# Altium PCB USBc to Ethernet(2.0).PcbDoc (part 3 of 3)
Units mil, origin at the board's own origin, x right, y up, seen from the top; angles counter-clockwise.
Board outline 2450 x 1100 mil, 4 copper layers (L1, L2, L3, L4), stack 61.58 mil thick; 85 components, 67 nets, 300 pads, 234 vias.
Unrouted connection lines stored in the file: 3.
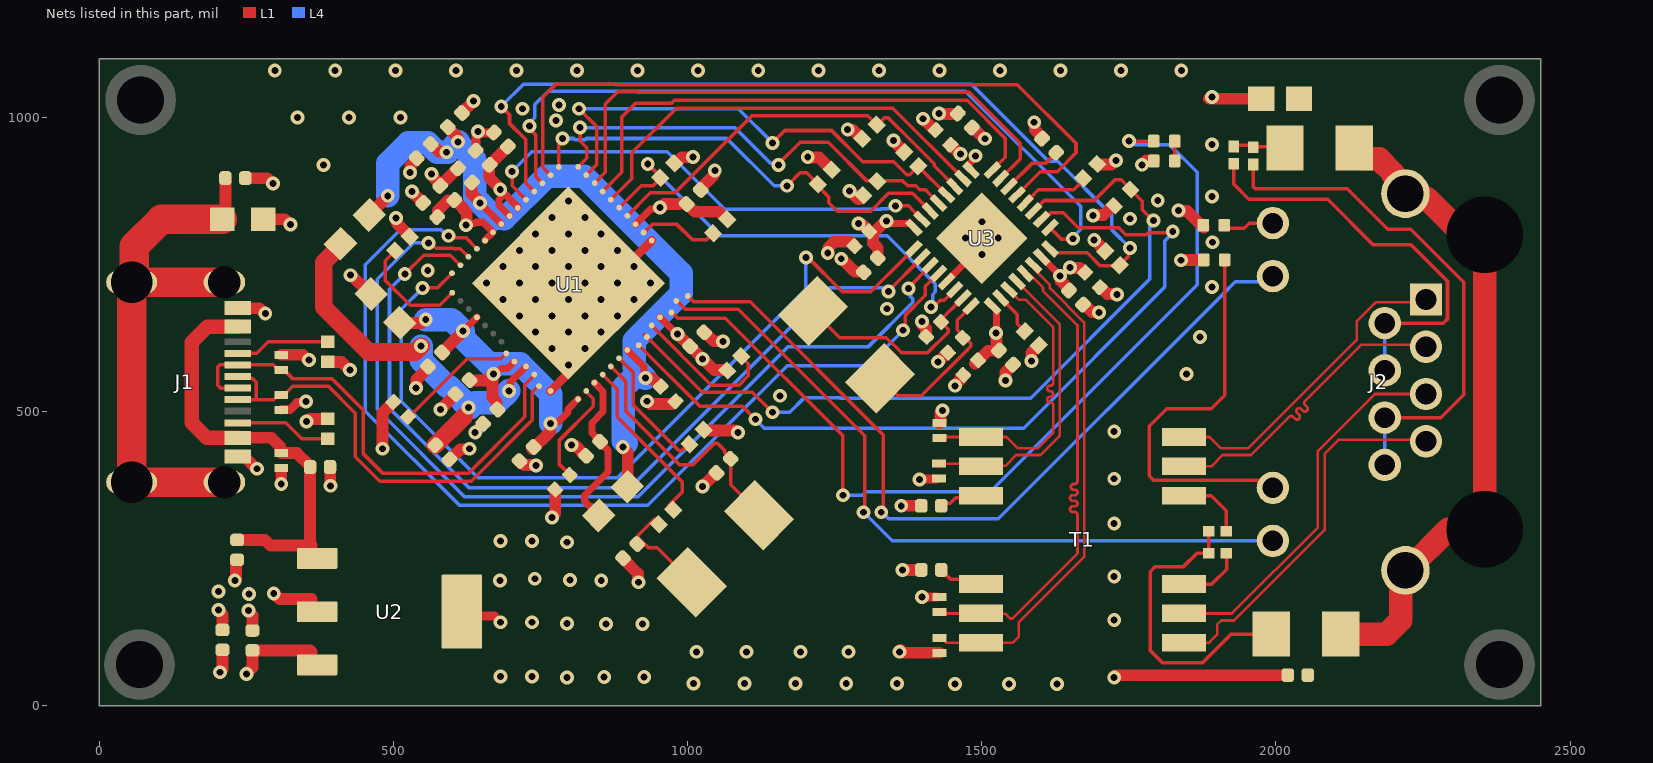
[diagram p4: the nets of this part, all layers, seen from the top]

## Part data (continued)
U3: library part CMP-09095-000001-1, "INDUSTRIAL ETHERNET GIGABIT PHY", Ambient Temperature Range High=+105°C, Ambient Temperature Range Low=-40°C, Manufacturer="Analog Devices", Max Junction Temp=+125°C, Max Supply Voltage=3.46V, Min Supply Voltage=1.71V, Nominal Supply Current=20-31mA, Package=CP-32-31, Temperature="-40°C to +105°C", Automotive=No, Category=IC, ComponentLink2Description=Datasheet, ComponentLink2URL=https://www.analog.com/media/en/technical-documentation/data-sheets/ADIN1200.pdf, Data Rate=100Mbits/s, Device Class L1="Integrated Circuits (ICs)", Device Class L2="Interface ICs", Device Class L3="Ethernet Interface ICs", Digikey Description="INDUSTRIAL ETHERNET GIGABIT PHY", Footprint Url=https://forum.upverter.com/uploads/short-url/dN8iC8CK9Ps5z8gUJcfltSaVrDQ.pdf, Height=0.8mm, Interface=Ethernet, Ipc Land Pattern Name=QFN50P500X500X75-32, Lead Free=Yes, Manufacturer Part Number=ADIN1200CCP32Z, Number of Channels=4, Octopart=https://octopart.com/adin1200ccp32z-analog+devices-103760365, RoHS=TRUE, Simplex Duplex="Full Duplex", Standoff Height=0.02mm, Temperature Range High=+105°C, Temperature Range Low=-40°C
Y1 Y2: library part 445I23A25M00000, "Parallel - Fundamental Quartz Crystal, 25MHz Nom", Case/Package=SMD/SMT, ESR (Equivalent Series Resistance)=40Ω, Frequency=25MHz, Frequency Stability=30ppm, Frequency Tolerance=0.002%, Load Capacitance=10pF, Manufacturer="CTS Components", Max Operating Temperature=85°C, Min Operating Temperature=-40°C, Category=Crystals, ComponentLink1Description=https://datasheet.octopart.com:443/445I23A25M00000-CTS-Components-datasheet-78374999.pdf?src-supplier=Electro+Sonic, ComponentLink1URL=https://datasheet.octopart.com:443/445I23A25M00000-CTS-Components-datasheet-78374999.pdf?src-supplier=Electro+Sonic, Contact Plating=Gold, Country of Origin="Mainland China", Harmonized Tariff Schedule (HTS) Code=8541.60.00.60, Height=1.3462mm, Introduction Date=2016-10-07, Length=5.0038mm, Lifecycle Status=Production, Manufacturer Part Number=445I23A25M00000, Mount="Surface Mount", Packaging="Tape & Reel", Pricing 1="6000=0.4851 (USD)", REACH SVHC=Unaffected, RoHS=Compliant, Series Resistance=40Ω, Supplier 1=DigiKey, Termination=SMD/SMT, Tolerance=0.002%, Width=3.2mm

## Free pads (board coordinates)
  round 120 hole 80: MH3(68,70) MH3(70,1030) MH3(2380,70) MH3(2380,1030)

## Via types
v1: diameter 23.62, hole 11.81, L1 to L4, tented both sides, 194 vias
v2: diameter 23.62, hole 11.81, L1 to L4, 40 vias

## Nets (pads, with @x,y where several pads share a name; then routed paths per layer and width w, separated by ;. In a path a pad name is that pad's centre, name@x,y a point inside that pad or via, vN(x,y) a via of type N, cw(c..) or ccw(c..) an arc to the next point about the centre after c; other vN are vias at no path point)
+3.3V: C10.2 C11.2 C13.2 C14.2 C15.2 C16.2 C17.2 C18.2 C19.2 C20.2 C21.2 C22.2 C23.2 C24.2 C25.2 C39.2 FB1.1 R2.2 R3.2 R4.2 R6.1 R14.2 R17.2 R18.2 R19.2 R20.2 R21.2 R22.2 R23.1 U1.25 U1.35 U1.48 U1.49 U1.51 U1.52 U2.3 U3.9 U3.15 U3.25 U3.32 | length 1770.6
  L1 w12: v1@626.02,820.02 626.36,819.68 637.7,819.68 640.02,822 652.08,822 U1.51@668.98,805.1 655.46,791.58 U1.52@655.46,790.78 ; v1(681.31,878) 711.14,848.17 U1.48@711.14,846.46 ; v1@688,869.84 679.13,860.96 679.13,850.63 U1.49@697.22,832.54 ; U1.35@911.02,818.62 937.11,844.7 950.7,844.7 v1(953,847) ; U1.25@952.78,660.49 980.91,632.37 v1(982.37,632.37) ; v1(1337.57,824.28) 1341.35,824.28 1345.43,820.19 1377.37,820.19 U3.32@1384.4,813.16 ; U3.25@1474.94,917.63 1486.78,929.47 1486.78,932.78 v1(1489,935) ; U3.9@1518.16,679.4 1525.06,672.5 1525.06,635.06 v1(1524,634) ; U3.15@1601.68,762.92 1601.68,762.78 1633,731.46 v1(1633,731)
  L1 w20: v1(205,57) 205,58.08 209,62.08 C11.2@209,95.07 ; v1(250,54) 250,55.08 260,65.08 C10.2@260,94.14 358.28,94.14 360.97,91.45 ; v1(427,732) 428.08,732 460,700.08 FB1.1@461.75,700.08 ; v1(504.37,829.57) 505.14,828.8 505.14,820.59 527.16,798.57 R21.2@527.16,797.68 ; C39.2@574.16,830.84 575,831.67 575,841.89 592.11,859 602.33,859 C14.2@603.16,859.84 603.75,859.84 619,844.59 619,843.4 624.5,837.9 624.5,819.59 623,818.08 v1(623,817) ; v1(681.31,878) 681.31,879.08 662.46,897.94 662.46,918.87 C17.2@663.29,919.71 C16.2@694.29,950.71 ; v1(953,847) 954.08,847 960.08,853 986.18,853 987.05,853.86 997.19,853.86 C13.2@998.03,853.03 ; R17.2@977.03,922.03 977.86,921.19 978.75,921.19 990.08,932.52 1007.44,932.52 v1@1007.92,933 ; v1(982.37,632.37) 982.53,632.37 1004.7,610.19 C15.2@1004.83,610.19 ; C13.2@998.92,853.03 1011.95,840 1053.16,840 1066.14,827.03 R22.2@1067.03,827.03 ; C15.2@1004.92,611.03 1004.92,609.98 1025.37,589.53 v1(1025.37,589.37) 1026.35,589.37 1044.9,570.81 1065.25,570.81 R14.2@1066.08,569.97 ; R6.1@1027.03,469.03 1027.86,468.19 1080.83,468.19 1084.24,464.78 v1(1085.22,464.78) ; v1(1271.97,979.97) 1272.66,979.27 1280.78,979.27 1296.08,963.97 R18.2@1296.97,963.97 ; v1(1290,820) 1290.77,819.23 1295.6,819.23 1308.3,806.53 C25.2@1308.53,806.53 ; C24.2@1323.14,762.7 1323.14,778.36 1315.13,786.36 1315.13,802.93 1336.48,824.28 v1(1337.57,824.28) ; v1(1350,961) 1350,960 1368.03,941.97 1368.03,941.08 R20.2@1367.97,941.03 ; C21.2@1446.43,953.63 C21.2@1446.8,954.01 ; C21.2@1446.9,954.11 C21.2@1446.8,954.01 ; C21.2@1446.9,954.13 1455.03,946 ; v1(1464,938) 1463.03,938 1447.03,954.01 C21.2@1446.8,954.01 ; C19.2@1482.97,983.03 1483.54,983.59 1484.43,983.59 1504.02,964 v1(1505,964) ; C20.2@1488.53,581.53 1510.44,603.44 1527,603.44 1527.3,603.14 1528.19,603.14 C18.2@1529.03,603.97 ; v1(1524,634) 1524.69,633.31 1524.69,618.31 1525,618 ; v1(1633,731) 1633.77,730.23 1633.77,722.8 1648.86,707.7 1648.86,706.81 C22.2@1648.03,705.97 ; v1@1650.07,744.8 1650.56,744.31 1666.52,744.31 1674.78,736.05 1675,736.05 C23.2@1675.47,736.53 ; v1(1688.81,833.62) 1689.5,834.32 1706.75,834.32 1723.69,851.25 1723.91,851.25 R23.1@1725.08,850.08 ; v1(1691,792) R19.2@1709.97,773.03 ; v1(1772.08,919.7) 1779.56,927.17 1792.24,927.17 1792.39,927.33 R2.2@1792.39,928 ; v1(1834,842) 1834.69,841.31 1848.65,841.31 R3.2@1877.13,812.83 ; v1(1838.19,757.46) 1838.46,757.73 1877.13,757.73 1877.28,757.89 R4.2@1877.28,758
  other v1: 1650.07,745.07 1009,933
"+3.3V VDD": C26.2 C27.2 C28.2 C29.2 FB1.2 U1.4 U1.9 U1.15 | length 736.2
  L1 w12: v1(618,637) U1.4@641.54,660.49 ; v1(669.94,564.33) 673.73,564.33 682.55,573.15 693.39,573.15 U1.9@705.43,585.19 ; v1(767,480) 769.3,482.3 779.87,482.3 796.77,499.2 796.77,504.49 U1.15@813.59,521.3
  L1 w20: FB1.2@510.57,651.27 511.22,650.62 547.53,650.62 553.57,656.67 v1(554.65,656.67) ; C27.2@582.29,600.65 582.29,600.97 618,636.68 v1(618,637) ; C29.2@629.13,553.65 629.97,552.81 657.35,552.81 668.86,564.33 v1(669.94,564.33) 669.94,563.25 668.26,561.56 668.26,523.66 675.46,516.46 675.46,504.48 C28.2@676.29,503.65 ; C26.2@736,436 766.23,466.23 766.23,479.23 v1(767,480)
  L4 w40: v1(554.65,656.67) 598.33,656.67 v1(618,637) 618,625.43 668.43,575 674.69,581.26 715.31,581.26 767,529.57 v1(767,480)
+5V: C1.2 C12.2 D2.2 J1.A4B9 J1.B4A9 U2.1 | length 729.6
  L1 w20: C12.2@234,282 281.13,282 290.57,272.55 360.97,272.55 358.07,275.45 C1.2@358.07,406 357.44,406.63 357.44,407.81 335.66,429.59 D2.2@309,429.59 307.19,431.4 307.19,440.69 292.36,455.51 J1.B4A9@234.84,455.51
  L1 w25: J1.B4A9@234.84,455.51 182.49,455.51 157,481 157,618 183.49,644.49 J1.A4B9@234.84,644.49
GA: J2.10 R4.1 | length 683.5
  L1 w6: R4.1@1912.72,758 1912.72,527.72 1890,505 1814,505 1784.49,475.49 1784.49,390.79 1792.24,383.04 1968.98,383.04 1981.47,370.55 J2.10@1994.76,370.55
GND: C1.1 C2.1 C3.1 C4.1 C5.1 C6.1 C7.2 C10.1 C11.1 C12.1 C13.1 C14.1 C15.1 C16.1 C17.1 C18.1 C19.1 C20.1 C21.1 C22.1 C23.1 C24.1 C25.1 C26.1 C27.1 C28.1 C29.1 C30.1 C31.1 C32.1 C33.1 C34.1 C35.1 C36.1 C37.2 C38.2 C39.1 D1.1 D2.1 D3.1 D4.1 D5.1 D6.1 D7.1 J1.A1B12 J1.B1A12 R1.2 R5.2 R8.2 R9.2 R15.1 R16.1 R24.1 R25.1 R26.1 R27.2 U1.13 U1.33 U1.57 U2.2 U2.4 U3.5 U3.33 | length 2765.4
  L1 w12: U3.5@1440.08,721.16 1486.08,767.16 v2(1500,767.16)
  L1 w15: D1.1@309,503 309.61,503.61 324.02,503.61 335.76,515.35 349.35,515.35 v1(351,517) ; U2.4@607.03,182 607.03,179.62 633.98,152.67 672,152.67 ; C17.1@640.19,945.19 640.19,970.85 643.24,973.9 v1(643.24,976.24) 648.89,976.24 651.31,973.81 669.52,973.81 C16.1@670.35,974.65 C16.1@671.19,975.48 ; U1.13@766.82,535.22 797.16,565.56 v2(797.16,579.48) ; v2(908.52,746.52) 908.52,760.44 U1.33@938.86,790.78 ; v1(1394,385) 1394.6,385.6 D7.1@1422.69,385.6 ; v1(1398,185) D4.1@1423.69,185
  L1 w20: v1(202,163.07) 202,161.99 209,154.99 C11.1@209,128.93 ; v1(230,213) 230,213.98 232.19,216.17 232.19,247.51 232.82,248.14 C12.1@234,248.14 ; J1.B1A12@234.84,424.02 245.67,424.02 265.92,403.77 267.23,403.77 v1(268,403) ; J1.A1B12@234.84,675.98 236.65,675.98 271.76,675.98 280.76,666.98 v1(281.84,666.98) ; C4.1@247.93,897 284.84,897 293.85,887.99 v1(294.93,887.99) ; v1(253,162.14) 253,161.06 260,154.06 C10.1@260,128 ; R15.1@278,827 279.81,827 314.91,827 323.92,817.99 v1(325,817.99) ; v1(296.26,190.91) 296.81,190.91 306.22,181.5 360.47,181.5 360.97,182 ; v1(309,377) D2.1@309,400.89 ; D3.1@309,596.59 310.81,596.59 345.91,596.59 354.92,587.58 v1(356,587.58) ; v1(352,483) 353.08,483 357.46,487.38 386.19,487.38 386.82,488.01 R5.2@388,488.01 ; R1.2@388,585 389.18,585 389.81,584.37 411.55,584.37 424.92,571 v1(426,571) ; C1.1@391.93,406 392.46,405.46 392.46,374.54 v1(393,374) ; v1(481,437) 481,497.66 R8.2@499,515.66 ; v1(527.81,906.34) 528.5,907.03 528.5,917.62 540.05,929.17 540.05,930.06 C32.1@539.22,930.9 ; v1(531,874) C39.1@550.22,854.78 ; v1(538,540) 538.77,540.77 538.77,554.56 559.19,574.98 C27.1@557.46,576.7 ; v1(564.51,904.4) 564.51,903.42 567,900.93 567,898.56 580.05,885.51 C14.1@580.05,884.62 ; C14.1@579.22,883.78 C14.1@580.05,884.62 ; C14.1@579.35,883.78 580.05,884.48 C14.1@580.05,884.62 ; v1(579.8,503.8) 579.8,504.05 605.19,529.45 C29.1@605.19,529.71 ; C34.1@594.97,419.03 595.86,419.03 613.14,436.31 628.31,436.31 v1(629,437) ; C31.1@609.09,913.65 C14.1@580.05,884.62 ; C33.1@616.1,1007.78 616.1,1007.94 636,1027.84 v1(636,1028) ; C26.1@714.03,416.03 714.92,416.03 721.45,409.5 741.16,409.5 v1(741.85,408.81) ; v1(769,320.19) 769,321.17 774.95,327.11 774.95,367 R9.2@774.47,367.47 ; v1(802.72,443.28) 803.41,442.59 808.58,442.59 826.14,425.03 C36.1@827.03,425.03 ; C2.1@890.06,251.06 890.06,250.17 915.31,224.92 915.31,210.69 v1(916,210) ; v1(930.72,517.72) 931.7,517.72 936.27,513.14 974.4,513.14 978.94,517.68 C30.1@979.16,517.68 ; C13.1@1021.97,877.86 1021.14,878.69 1045.24,902.8 1045.24,909.23 v1(1046.01,909.99) ; v1(1024.97,372.97) 1025.47,372.97 1048.53,396.03 C3.1@1049.03,396.03 ; C15.1@1027.97,634.97 1028.86,634.97 1044.14,619.69 1059.31,619.69 v1(1060,619) ; v1(1204,933) 1204.77,932.23 1222.93,932.23 1244.14,911.03 R26.1@1245.03,911.03 ; v1(1238,770) 1238.77,770.77 1238.77,778.78 1248.99,789 1275.72,789 1283.25,781.47 C25.1@1283.47,781.47 ; v1(1261,760) 1262.08,760 1284.22,737.86 1299.19,737.86 C24.1@1300.03,737.03 ; v1(1275,875) 1276.06,875 1290.08,860.97 R25.1@1290.97,860.97 ; v1@1361.67,95.31 1366.98,90 D5.1@1428,90 ; v1(1363,340) 1393.94,340 1395.35,341.41 C6.1@1395.35,342.28 ; v1(1365,231) C5.1@1397.07,231 ; v1(1398,653) 1398.69,652.31 1398.69,647.82 1405,641.51 C38.2@1405,628.17 ; v1@1400.69,997.31 C21.1@1414.73,983.27 ; v1(1425.14,584.8) 1425.97,584.8 1441.95,600.78 1442.17,600.78 C37.2@1442.47,600.47 ; v1(1427,1007) 1427.69,1006.31 1431.7,1006.31 1431.87,1006.14 C19.1@1457.3,1006.14 ; D6.1@1428,480.59 1429.81,482.4 1429.81,498.02 1433,501.21 v1(1433,502.19) ; v1(1454,544) 1454,544.98 1465.47,556.45 C20.1@1465.47,559.47 ; v1(1540.02,553.25) 1540.02,567.08 C18.1@1552.97,580.03 ; v1(1584.08,586.2) 1584.08,600.03 R27.2@1597.03,612.97 1597.03,613.2 R27.2@1596.55,613.67 ; v1(1589,992) 1589.77,991.23 1589.77,979.4 1603.28,965.89 1602.45,965.05 C35.1@1602.45,964.16 ; C22.1@1671.97,682.03 1672.81,682.86 1673.7,682.86 1686.95,669.61 1698.39,669.61 v1(1699.15,668.85) ; R24.1@1696.03,921.03 1696.86,920.19 1720.21,920.19 1727.02,927 v1(1728,927) ; C23.1@1700.53,711.47 1701,711.95 1701.22,711.95 1713.05,700.11 1728.89,700.11 v1(1729.65,699.35) ; v1@1724.17,48 1723.19,48 v1@1727.19,52 ; v1@1729.98,52 C7.2@2020.14,52 ; v1@1886,1032 R16.1@1973.46,1032
  L4 w20: v1(638.73,464.27) 638.73,464.73 653,479
  other v1: 1454,37 1546,37 1628,37 1010,38 1096.5,38 1183,38 1269.5,38 1356,38 795,48 1725,48 858,49 926,49 682,50 735,50 1015,91.81 1100,91.81 1192,91.81 1273,91.81 1360,91.81 861,139 923,139 795,140 682,142 735,142 1725,146 254,190 202,194 681,213 853,213 800,214 740,216 1725,220 795,278 682,280 735,280 1725,310 1725,386 1725,466 1157,527 1848,564 1871,627 1339,675 1891,712 558,740 1892,788 1752,828 1799,859 1891,866 381,919 1891,954 776,995 1400,998 336.5,1000 424,1000 511.5,1000 719,1015 781,1021 1891,1035 298,1080 400.73,1080 503.47,1080 606.2,1080 708.93,1080 811.67,1080 914.4,1080 1017.13,1080 1119.87,1080 1222.6,1080 1325.33,1080 1428.07,1080 1530.8,1080 1633.53,1080 1736.27,1080 1839,1080
  other v2: 769.32,607.32 825,607.32 741.48,635.16 797.16,635.16 852.84,635.16 713.64,663 769.32,663 825,663 880.68,663 685.81,690.84 741.48,690.84 797.16,690.84 852.84,690.84 908.52,690.84 657.97,718.68 713.64,718.68 769.32,718.68 825,718.68 880.68,718.68 936.36,718.68 685.81,746.52 741.48,746.52 797.16,746.52 852.84,746.52 713.64,774.36 769.32,774.36 825,774.36 880.68,774.36 1472.16,795 1527.84,795 741.48,802.19 797.16,802.19 852.84,802.19 1500,822.84 769.32,830.03 825,830.03 797.16,857.87
GND_CLASSIS: C7.1 C8.1 C9.1 J2.MH1 J2.MH2 J2.S1 J2.S2 R16.2 | length 1149.1
  L1 w40: C8.1@2110.06,122 2188.36,122 2211.79,145.43 2211.79,222.23 J2.S1@2219.96,230.39 2223.12,230.39 2293.2,300.47 J2.MH1@2355,300.47 J2.MH2@2355,800.47 2318.53,800.47 2256.61,862.39 J2.S2@2228.13,862.39 ; C9.1@2136.06,948 2136.06,941.11 2147.55,929.61 2175.19,929.61 2198.62,906.18 2198.62,903.44 2219.96,882.1 J2.S2@2219.96,870.55 J2.S2@2219.96,874.84
GND_USB: C4.2 J1.S1 J1.S2 J1.S3 J1.S4 R15.2 | length 946
  L1 w20: R15.2@208.97,827 214.07,832.1 C4.2@214.07,897
  L1 w50: J1.S3@67.72,720.08 J1.S1@212.2,720.08 ; R15.2@208.97,827 105,827 58.92,780.92 58.92,724.28 J1.S3@54.72,720.08 J1.S4@54.72,379.92 J1.S2@212.2,379.92
"LNKA LED": J2.9 U1.27 | length 1261.8
  L1 w6: U1.27@980.62,688.33 981.68,688.33 996.01,674 1086,674 1300.63,459.37 1300.63,330.63 v1(1299,329)
  L4 w6: v1(1299,329) 1347.61,280.39 J2.9@1994.76,280.39
"MAC COL": R19.1 U1.46 U3.16 | length 1550
  L1 w6: v1(683,1019) 697,1005 697,990 725,962 725,888.27 U1.46@738.98,874.3 ; U3.16@1615.6,776.84 1622.63,769.81 1626.74,769.81 1626.93,770 1630,770 1679,770 1700.84,748.16 1722.38,748.16 1733.19,748.14 R19.1@1734.03,748.97 1748.74,763.69 1748.74,774.74 v1(1752,778)
  L4 w6: v1(683,1019) 721,1057 1482,1057 1613.21,925.79 1628.91,925.79 1721.13,833.57 1721.13,808.87 v1(1752,778)
"MAC CRS": U1.45 U3.17 | length 1273.8
  L1 w6: v1(730.72,985.72) 730.72,980.95 741.33,970.33 741.33,899.78 U1.45@752.9,888.22 ; U3.17@1615.6,813.16 1635.39,793.37 1654.41,793.37 v1(1654.97,793.94)
  L4 w6: v1(730.72,985.72) 730.72,990.48 740.15,999.92 740.15,1022.15 763,1045 1472,1045 1668,849 1668,810.34 1654.97,797.31 v1(1654.97,793.94)
MDC: U1.22 U3.18 | length 1396.5
  L1 w6: U1.22@916.73,613.03 1020.76,509 1093.01,509 v1(1114.91,487.1) ; U3.18@1601.68,827.08 1605.79,827.08 1616.71,838 1638.55,838 1663.74,812.81 1732.76,812.81 1744.57,801 1779.59,801 1782.78,804.19 1822.56,804.19 v1(1824.47,806.1)
  L4 w6: v1(1114.91,487.1) 1130.01,472 1571,472 1811,712 1811,790.14 1824.47,803.61 v1(1824.47,806.1)
MDI_0_N: D7.2 T1.2 U3.12 | length 527.3
  L1 w4.5: D7.2@1422.71,411.29 D7.2@1427,407 ; D7.2@1427,411.8 1427.16,411.64 1493.72,411.64 T1.2@1498.36,407 1499.26,407.9 1539.88,407.9 1558.23,426.25 1599.51,426.25 1632.64,459.38 1632.64,648.44 1570.54,710.54 U3.12@1559.92,721.16
MDI_0_P: D6.2 T1.1 U3.11 | length 519.5
  L1 w4.5: D6.2@1428,457 T1.1@1498.36,457 1542,457 1561.25,437.75 1594.75,437.75 1621.14,464.14 1621.14,508.75 1621.14,511 ccw(c1616.39,511) 1616.39,515.75 1615.75,515.75 cw(c1615.75,520.5) 1615.75,525.25 1616.39,525.25 ccw(c1616.39,530) 1616.39,534.75 1615.75,534.75 cw(c1615.75,539.5) 1615.75,544.25 1616.39,544.25 ccw(c1616.39,549) 1621.14,549 1621.14,572.75 1621.14,643.67 1574.82,690 1563,690 1547.76,705.24 U3.11@1543,705.24
MDI_1_N: D5.2 T1.8 U3.14 | length 855.8
  L1 w4.5: D5.2@1428,115.59 1431.41,115.59 1440,107 T1.8@1498.36,107 1552,107 1563,118 1563,142.12 1674,253.12 1674,393 1674,651.63 1615.52,710.11 1615.52,715.68 1596.46,734.74 1596.46,735.13 1587.76,743.83 U3.14@1587.76,749
MDI_1_P: D4.2 T1.7 U3.13 | length 850.8
  L1 w4.5: D4.2@1426.57,158.43 1428,158.43 1429.43,157 T1.7@1498.36,157 1498.87,156.49 1539.88,156.49 1547.95,148.41 1551.68,148.41 1662.5,259.23 1662.5,322.5 1662.5,324.75 ccw(c1657.75,324.75) 1657.75,329.5 1654.58,329.5 cw(c1654.58,334.25) 1654.58,339 1657.75,339 ccw(c1657.75,343.75) 1657.75,348.5 1654.58,348.5 cw(c1654.58,353.25) 1654.58,358 1657.75,358 ccw(c1657.75,362.75) 1657.75,367.5 1655.99,367.5 cw(c1655.99,372.25) 1655.99,377 1657.75,377 ccw(c1657.75,381.75) 1662.5,381.75 1662.5,402.5 1662.5,646.87 1604.02,705.35 1604.02,710.91 1588.33,726.6 1587.49,726.6 1579.01,735.08 U3.13@1573.84,735.08
MDIO: R23.2 U1.23 U3.19 | length 1374.3
  L1 w6: 926,631 930.35,626.65 930.95,626.65 1024.49,533.11 1109.89,533.11 v1(1144,499) ; U3.19@1587.76,841 1605.76,859 1617.55,859 1691.3,859 1726.36,894.06 1736.78,894.06 1772.92,857.92 1772.92,843.46 1791.38,825 v1(1792,825)
  L4 w6: v1(1144,499) 1173.48,499 1198.48,524 1258.09,524 1259.09,523 1583,523 1785,725 1785,813.23 1792,820.23 v1(1792,825)
NetC2_2: C2.2 R7.1 Y1.1 | length 152.1
  L1 w6: R7.1@942.97,316.97 913.97,287.97 921.97,279.97 933.3,268.64 948.08,268.64 Y1.1@996.86,219.86
NetC3_2: C3.2 U1.19 Y1.2 | length 432.5
  L1 w6: U1.19@869.26,576.98 895,551.24 895,501 986,410 1009,410 1045.51,446.51 1050.49,446.51 1063,434 1063,429.95 C3.2@1072.97,419.97 1073,375.97 1111,337.97 Y1.2@1111,334
NetC5_2: C5.2 T1.6 | length 77.4
  L1 w6: C5.2@1430.93,231 1446.4,215.52 1489.84,215.52 T1.6@1498.36,207
NetC6_2: C6.2 T1.3 | length 74.5
  L1 w6: C6.2@1430.93,340 1435.33,344.4 1446.4,344.4 1455.48,353.48 1494.84,353.48 T1.3@1498.36,357
NetC8_2: C8.2 R10.1 R11.1 | length 543.9
  L1 w6: R11.1@1886,297 R10.1@1886,259 1865,259 1842,236 1794,236 1786,228 1786,94 1807,73 1875,73 1924,122 C8.2@1991.94,122 ; C8.2@1974.91,128.96 C8.2@1991.94,146
NetC9_2: C9.2 R12.1 R13.1 | length 93.1
  L1 w6: R12.1@1934,952.76 1942,952.76 R13.1@1958,952.76 ; R13.1@1965,951.53 1966.04,951.53 1966.86,950.71 2017.29,950.71 C9.2@2028.91,939.09
NetC35_2: C35.2 U3.22 | length 104.2
  L1 w6: U3.22@1546,882.76 1585.18,921.94 1608.1,921.94 C35.2@1626.39,940.22
NetC37_1: C37.1 U3.8 Y2.1 | length 289.6
  L1 w6: Y2.1@1327.07,556.93 1327.86,556.93 1357.79,527 1397.04,527 1472.44,602.41 1481.29,611.25 1481.29,616.22 C37.1@1469.75,627.75 ; C37.1@1469.06,627.06 1469.06,628.01 1458,639.07 1458,655.13 1481.84,678.97 U3.8@1481.84,679.4
NetC38_1: C38.1 U3.7 Y2.2 | length 351.8
  L1 w6: Y2.2@1212.93,671.07 1258.22,625.78 1337.76,625.78 1363.54,600 1407.7,600 1441.27,633.58 1442.89,635.19 1442.89,640.16 C38.1@1430.53,652.53 ; C38.1@1428.68,654.38 1467.62,693.32 U3.7@1467.92,693.32
NetJ1_A5: J1.A5 R1.1 | length 161.4
  L1 w6: J1.A5@234.84,599.21 267.21,599.21 287.02,619.02 R1.1@388,619.02
NetJ1_B5: J1.B5 R5.1 | length 164.4
  L1 w6: J1.B5@234.84,481.1 316.9,481.1 344.01,453.99 R5.1@388,453.99
NetJ2_2: J2.2 J2.4 R12.2 | length 720.4
  L1 w6: R12.2@1928,921.24 1928,887 1953.8,861.2 2087.8,861.2 2165,784 2229.48,784 2291.56,721.92 2291.56,657.56 2284.47,650.47 J2.2@2184.92,650.47
  L4 w6: J2.4@2184.92,570.16 J2.2@2184.92,650.47
NetJ2_6: J2.6 J2.8 R13.2 | length 884.7
  L1 w6: R13.2@1961,920.24 1961,882.51 1964.51,879 2121,879 2189.88,810.12 2228.88,810.12 2319,720 2319,529 2279.84,489.84 J2.6@2184.92,489.84
  L4 w6: J2.8@2184.92,409.53 J2.6@2184.92,489.84
NetLED1_2: LED1.2 R2.1 | length 38
  L1 w6: R2.1@1827.83,928 LED1.2@1827.83,966
NetR6_2: R6.2 U1.20 | length 221.7
  L1 w6: U1.20@883.18,590.9 907,567.08 907,512 985.18,433.82 990.15,433.82 1001.3,444.97 R6.2@1002.97,444.97
NetR7_2: R7.2 U1.18 | length 287.7
  L1 w6: U1.18@855.34,563.06 880,538.4 880,491 991,380 991,364 R7.2@968.03,341.03
NetR8_1: R8.1 U1.8 | length 207.6
  L1 w6: R8.1@528,492.85 528,493 625,590 682.4,590 U1.8@691.51,599.11
NetR9_1: R9.1 U1.16 | length 178.8
  L1 w6: R9.1@799.53,392.53 781.9,410.15 781.9,451.9 839.51,509.51 839.51,522.15 827.51,534.16 U1.16@827.51,535.22
NetR10_2: R10.2 T1.11 | length 109.9
  L1 w6: T1.11@1843.64,207 1891,207 1916,232 1916,258.53 R10.2@1915.53,259
NetR11_2: R11.2 T1.14 | length 116.9
  L1 w6: T1.14@1843.64,357 1890,357 1915.53,331.47 R11.2@1915.53,297
NetR14_1: R14.1 U1.24 | length 250.8
  L1 w6: U1.24@938.86,646.58 938.86,646.44 1040.2,545.11 1087.11,545.11 1103,561 1103,581.54 1091.03,593.51 R14.1@1091.03,594.03
NetR27_1: R27.1 U3.10 | length 73.2
  L1 w6: U3.10@1532.08,693.32 1555.98,669.43 1560.36,665.04 1560.36,649.64 R27.1@1572.97,637.03
"PDX LED": LED1.1 U1.26 | length 1603.2
  L1 w6: U1.26@972.41,668.71 973.47,668.71 983.17,659 1064,659 1263.9,459.1 v1(1263.9,357.91) ; v1@1750.29,959.71 1785.71,959.71 LED1.1@1792,966
  L4 w6: v1(1263.9,357.91) 1296.72,357.91 1302.81,364 1514,364 1866,716 1866,907.02 1819.02,954 1760.77,954 1754.77,960 v1(1750,960)
"PHY INT": R21.1 U1.1 | length 197.7
  L1 w6: R21.1@503.11,773.62 486,756.52 486,723 528,681 578.53,681 U1.1@599.78,702.25
"PHY LINK ST": R24.2 U3.20 | length 106.8
  L1 w6: U3.20@1573.86,854.92 1584.47,865.53 1595.93,877 1599.55,877 1656,877 R24.2@1666.97,887.97
"PHY RESET": R17.1 U1.37 U3.6 | length 791.3
  L1 w6: U1.37@883.58,846.86 920.73,884 941,884 952.97,895.97 952.97,900.03 v1(932,921) ; v1(1413.61,678.18) 1418.38,678.18 1429.55,689.35 1436.11,689.35 U3.6@1454,707.24
  L4 w6: v1(932,921) 1054,799 1339,799 1421,717 1421,703.67 1416.32,698.99 1416.32,680.89 v1(1413.61,678.18)
"PHY SEL": R22.1 U1.34 | length 139.7
  L1 w6: U1.34@924.94,804.7 926,804.7 940.3,819 981,819 1008,792 1032,792 R22.1@1042.97,802.97
RD_N: J2.7 T1.9 | length 641.4
  L1 w4.5: T1.9@1843.64,107 1886.36,107 1889,109.64 1889,110 1900,121 1900,138 1907,145 1929,145 2082.62,298.62 2082.62,428.36 2106.26,452 2252.68,452 J2.7@2255,449.68
RD_P: J2.5 T1.10 | length 641.9
  L1 w4.5: T1.10@1843.64,157 1924.74,157 2071.12,303.38 2071.12,317.75 2071.12,433.12 2168,530 J2.5@2255,530
RXCLK: R20.1 U1.41 U3.28 | length 847.6
  L1 w6: v1(815,1015) 845,985 845,919.63 U1.41@827.51,902.14 ; v1(1144,957) 1165,978 1244.5,978 1297.5,925 1350,925 1372.54,902.46 1377.51,902.46 R20.1@1392.03,916.97 1392.03,916.89 U3.28@1440.08,868.84
  L4 w6: v1(815,1015) 1086,1015 v1(1144,957)
RXD0: R18.1 U1.36 U3.27 | length 688.7
  L1 w6: U1.36@897.5,832.94 936.56,872 978.31,872 1109.12,1002.81 1306.24,1002.81 R18.1@1321.03,988.03 1323.03,988.03 1335,1000 1340,1000 1358.19,981.81 1358.62,981.81 1418.89,921.54 1418.89,917.86 U3.27@1454,882.76
RXD1: U1.38 U3.26 | length 738.2
  L1 w6: U1.38@869.26,860.38 905,896.11 905,940 981,1016 1348.6,1016 U3.26@1467.92,896.68
RXD2: U1.39 U3.24 | length 893.9
  L1 w6: U1.39@855.34,874.3 888,906.95 888,1001 911,1024 972.03,1024 977.53,1029.51 1474.93,1029.51 1540,964.43 1540,932.44 U3.24@1518.16,910.6
RXD3: U1.40 U3.23 | length 965.3
  L1 w6: U1.40@841.82,888.62 860,906.79 860,1023 881,1044 914.03,1044 915.03,1043 1478.4,1043 1565,956.4 1565,929.6 U3.23@1532.08,896.68
RXDV: R25.2 U1.42 U3.29 | length 774.7
  L1 w6: U1.42@813.99,916.45 828.18,930.65 828.18,948.8 817,959.98 v1(817,983) ; v1(1154,919) 1154,921 1191,958 1239,958 1304.78,892.22 1309.75,892.22 1310.4,892.86 1319.65,892.86 1321.32,891.19 1333.65,891.19 1335.32,892.86 1365.17,892.86 1374.03,884 1387.63,884 1394.63,877 1404.08,877 1410.54,870.54 U3.29@1426.16,854.92
  L4 w6: v1(817,983) 1080,983 1140.63,922.37 1150.63,922.37 v1(1154,919)
RXER: U1.44 U3.21 | length 1241.3
  L1 w6: U1.44@766.82,902.14 753.33,915.62 753.33,1034.33 776,1057 877.03,1057 878.03,1056 1560.13,1056 1660,956.13 1660,940 1627.94,907.94 1599.02,907.94 U3.21@1559.92,868.84
"SPD LED": J2.11 U1.28 | length 1404.2
  L1 w6: U1.28@1000.25,696.55 1009.79,687 1106,687 1332,461 1332,332 v1(1329,329)
  L4 w6: v1(1329,329) 1330.02,329 1341.33,317.7 1527.7,317.7 1898.19,688.19 1898.62,688.19 1910.81,700.38 1910.81,700.81 1931,721 1985.37,721 J2.11@1994.76,730.39
TD_N: J2.3 T1.15 | length 537.8
  L1 w4.5: T1.15@1843.64,407 1890,407 1909.25,426.25 1957.51,426.25 2014.2,482.93 2022.51,491.24 cw(c2025.86,487.88) 2029.22,491.24 2032.34,488.12 ccw(c2035.7,491.48) 2039.06,488.12 ccw(c2035.7,491.48) 2039.06,494.84 2035.94,497.96 cw(c2039.3,501.32) 2035.94,504.68 cw(c2039.3,501.32) 2042.66,504.68 2045.78,501.56 ccw(c2049.14,504.92) 2052.49,501.56 ccw(c2049.14,504.92) 2052.49,508.28 2049.38,511.4 cw(c2052.73,514.75) 2049.38,518.11 2082.81,551.54 2145.13,613.87 2251.45,613.87 J2.3@2255,610.31
TD_P: J2.1 T1.16 | length 542.4
  L1 w4.5: T1.16@1843.64,457 1887,457 1906.25,437.75 1952.75,437.75 2137,622 2137,653.19 2170.09,686.28 2250.65,686.28 J2.1@2255,690.63
TX_CLK: U1.47 U3.31 | length 821.6
  L1 w6: v1(701,908) 701.44,907.56 701.44,884 U1.47@725.06,860.38 ; v1(1353,850) 1375.4,850 1382.7,842.7 U3.31@1398.32,827.08
  L4 w6: v1(701,908) 735,942 965,942 1063,844 1327.86,844 1328.94,845.09 1340.67,845.09 1342.22,846.63 1349.63,846.63 v1(1353,850)
TXD0: U1.56 U3.1 | length 1434.1
  L1 w6: v1(549.28,710.28) 574.17,710.28 U1.56@599.38,735.5 ; v1(1201,762) 1204.34,762 1262.62,703.72 1311.28,703.72 1368.78,761.22 U3.1@1384.4,776.84
  L4 w6: v1(549.28,710.28) 513,674 513,518 643,388 881,388 1201,708 v1(1201,762)
TXD1: U1.55 U3.2 | length 1483.6
  L1 w6: v1(519,734) 551,766 596.01,766 612.99,749.02 U1.55@613.7,749.02 ; v1(1341.51,704.52) 1341.51,705.31 1398.32,762.12 U3.2@1398.32,762.92
  L4 w6: v1(519,734) 493,708 493,506 628,371 902,371 1242,711 1330,711 1333.11,707.89 1338.14,707.89 v1(1341.51,704.52)
TXD2: U1.54 U3.3 | length 1602.1
  L1 w6: v1(559,787) 562.51,787 571.51,778 600.98,778 601.98,777 613.56,777 U1.54@627.22,763.34 ; v1(1375.32,709.68) 1375.32,710.88 1412.24,747.8 U3.3@1412.24,749
  L4 w6: v1(559,787) 534,787 472,725 472,504 621,355 915,355 1170,610 1306.43,610 1382.3,685.87 1382.3,691.87 1378.69,695.49 1378.69,706.31 v1(1375.32,709.68)
TXD3: U1.53 U3.4 | length 1701.5
  L1 w6: v1(593,799) 596,796 622.4,796 U1.53@641.33,777.07 ; v1(1366.11,638.45) 1369.38,641.72 1369.38,663.38 1404,698 1404,712.92 U3.4@1426.16,735.08
  L4 w6: v1(593,799) 590.67,799 580.67,809 511,809 452,750 452,501 612,341 932,341 1051,460 1051,460.7 1063.3,473 1064,473 1169,578 1305.66,578 v1(1366.11,638.45)
TXEN: R26.2 U1.43 U3.30 | length 779.3
  L1 w6: U1.43@780.74,916.58 780.74,953.46 786.9,959.63 v1(786.9,964.4) ; v1(1169,884) 1190.94,905.94 1202.01,905.94 R26.2@1220.97,886.97 1220.97,884.03 1240,865 1240,855 1254,841 1311,841 1341,871 1382.24,871 1396.62,856.62 U3.30@1412.24,841
  L4 w6: v1(786.9,964.4) 806.17,964.4 808.38,962.19 825.62,962.19 827.83,964.4 1066.6,964.4 1147,884 v1(1169,884)
USB_N: D3.2 J1.A7 J1.B7 U1.11 | length 828.7
  L1 w6: J1.A7@234.84,540.16 205.84,540.16 201,545 201,576.01 204.51,579.53 J1.B7@234.84,579.53 295.55,579.53 304.08,571 313.92,571 317.81,567.11 317.81,566.54 328.05,556.3 394.7,556.3 402.32,548.68 448,503 448,429 482,395 626.62,395 722.94,491.32 722.94,545.96 738.98,562 U1.11@738.98,563.06
USB_P: D1.2 J1.A6 J1.B6 U1.12 | length 792.1
  L1 w6: J1.B6@234.84,520.47 265.4,520.47 ; J1.A6@234.84,559.84 237.75,556.94 259.33,556.94 266.48,549.79 266.48,521.55 265.4,520.47 ; U1.12@747.19,543.43 746.13,543.43 735.94,533.24 735.94,485.94 632,382 476.62,382 435,423.62 435,497.62 389.32,543.3 328.63,543.3 313.92,528.59 304.08,528.59 295.96,520.47 265.4,520.47
VDDCORE: C30.2 C31.2 C32.2 C33.2 FB2.1 FB3.1 U1.21 U1.50 | length 1478.7
  L1 w12: v1(647,855) 647,854.92 U1.50@682.9,819.02 ; U1.21@897.1,604.82 925.32,576.6 925.32,559.68 v1(928,557)
  L1 w20: FB2.1@458.41,834.41 458.41,834.91 490,866.5 v1(490,867) ; C32.2@563.16,954.84 564.05,954.84 577.2,941.69 589.31,941.69 v1(590,941) ; C33.2@592.16,983.84 592.16,982.95 608.99,966.12 608.99,959.49 v1(609.69,958.8) ; C31.2@633.29,889.71 632.46,888.87 632.46,870.62 647,856.08 v1(647,855) ; v1(889.57,440) 889.57,439.02 898.05,430.53 898.05,373.05 FB3.1@897.41,372.41 ; v1(928,557) 928.77,556.23 940.6,556.23 C30.2@954.11,542.73
  L4 w20: 674,828 688,828
  L4 w30: 638,864 v1(647,855)
  L4 w40: v1(490,867) 490,922 524.93,956.93 558.07,956.93 574,941 591.89,941 v1(609.69,958.8) ; v1@609,957 638,928 638,864 ; v1(647,855) 674,828 ; 688,828 760,900 824,900 989,735 989,700.74 909.2,620.94 909.2,575.8 v1(928,557) ; v1@895.57,446 890.59,450.98 890.59,540.93 907.66,558
VDDPLL: C34.2 FB2.2 U1.10 | length 662.6
  L1 w12: v1(696.07,535.26) 698.29,537.48 698.29,550.21 U1.10@725.06,576.98
  L1 w30: FB2.2@409.59,784.51 409.59,782.45 381.33,754.19 381.33,677.82 457.71,601.45 536.69,601.45 v1(546.62,611.37) ; C34.2@571.03,442.97 619.95,491.89
  L4 w40: v1(546.62,611.37) 546.62,587.38 591.89,542.11 594.96,542.11 617.22,519.85 617.22,516.78 v1(627,507) 630.09,507 638.09,515 675.81,515 v1(696.07,535.26)
VDDUSBPLL: C36.2 FB3.2 U1.17 | length 277.5
  L1 w12: U1.17@841.42,549.14 856,534.56 856,500 837,481 837,463.53 850.97,449.56 C36.2@850.97,448.97 850.97,448.17 864.74,434.41 864.74,397.74 824.56,357.56 824.56,347.62 FB3.2@848.59,323.59
YA: J2.12 R3.1 | length 85.6
  L1 w6: R3.1@1912.72,812 1946,812 1954.55,820.55 J2.12@1994.76,820.55
pads on no net: J1.A8 J1.B8 U1.2 U1.3 U1.5 U1.6 U1.7 U1.14 U1.29 U1.30 U1.31 U1.32

## Polygon pours and split planes (outlines as drawn)
GND on L4 "GND_L04_P028" (solid, remove dead copper, pour order 28): 24,14 25,13 1759,13 1759,125 1759,540 1912,540 1912,1066 1886,1092 24,1092
GND_CLASSIS on L4 "GND_CLASSIS_L04_P001" (solid, remove dead copper, pour order 1): 2065,1086.09 2065,880 2170,880 2170,750 2320,750 2320,340 2170,340 2170,210 2040,210 2040,10 2441.51,10 2441.51,1086.09
+3.3V on L1 "+3.3V_L01_P020" (solid, pour order 20): 1505.12,985.99 1480.65,1012.9 1488.61,1004.14 1433.9,966.16 1433.9,945.42 1459.4,919.92 1464.56,919.92 1491.2,893.29 1499.24,901.33 1499.24,902.08 1498.86,902.08 1491.2,909.75 1491.2,913.75 1512.83,928.37 1532.04,961.51
+3.3V on L1 "+3.3V_L01_P030" (solid, pour order 30): 943.18,662.3 966.48,639 967,639 967,630 1043,554 1068,554 1084,570 1073.19,582.28 1068,586 1060.17,578.8 1049.15,582.12 1033.88,598.45 1007.08,624.19 978.67,649.33 973.39,649.33 972.73,648.67 952.18,669.23
GND on L1 "GND_L01_P024" (solid, remove dead copper, pour order 24): 23,17 24,16 1758,16 1758,128 1758,543 1912.72,543 1912.72,1067.28 1888,1092 23,1092
GND on L1 "GND_L01_P022" (solid, pour order 22): 166,233 166,119 406,119 505,20 926,20 944,38 944,212 879,277 842,277 797,322 544,322 442,220 283,220 245,258 172.25,258
+5V on L1 "+5V_L01_P021" (solid, pour order 21): 257.83,443.79 282.62,419 325.6,419 332.29,408.21 323.52,351.34 226.5,335 195.5,304 195.5,266 256.5,266 294.5,228 432.5,228 450.5,246 450.5,282 388.5,344 373.5,359 370.8,438.09 323.5,442 296.5,469 294.5,467 257.5,467
+3.3V on L1 "+3.3V_L01_P019" (solid, pour order 19): 1585.56,770.22 1618.49,737.29 1618.49,717.51 1646.65,689.35 1691,733.7 1691,741.7 1672,760.7 1639,760.7 1632.43,754.13 1618.49,754.13 1593.65,778.97
+3.3V on L1 "+3.3V_L01_P018" (solid, pour order 18): 1283.83,831 1278.17,826.17 1278.17,811.88 1287.21,802.83 1288.17,802.83 1300.83,790.17 1305.49,772.95 1306.41,772.03 1304.91,759.09 1324.48,739.52 1385.3,800.34 1385.3,801.58 1388.42,801.58 1390.51,799.49 1392.49,799.49 1399.41,806.41 1374.82,831 1323.32,834.6 1311,832
+3.3V on L1 "+3.3V_L01_P016" (solid, pour order 16): 897.67,813.15 898.25,812.56 898.25,810.8 901.52,807.53 907.56,807.53 907.56,808.71 938.41,839.56 943.98,834 989,834 997,826 1053.43,826 1071.39,808.04 1078,808.04 1094.96,825 1094.96,844 1080.96,858 1026.96,858 1018.96,850 1021.96,853 1015.96,858 1004.61,869.35 990.47,869.35 981.31,860.19 935.75,860.19 935.75,859.87 918.95,843.07 918.95,837 897.15,815.2
+3.3V on L1 "+3.3V_L01_P015" (solid, pour order 15): 669,865.92 669,852.16 703.33,817.83 723.51,838.01 723.51,844.15 691.42,876.24 691.42,889.51 679.85,901.08
+3.3V on L1 "+3.3V_L01_P014" (solid, pour order 14): 641.96,796.49 639.14,799.31 638.03,805.1 639.14,808.71 656.51,826.09 680.18,802.42 680.18,796.29 662.54,778.65 659.78,778.65
+3.3V on L1 "+3.3V_L01_P011" (solid, pour order 11): 637.25,803.75 651.41,817.91 644.74,832.75 601.99,875.49 555.25,828.75 572.25,811.75 590.75,830.25 617.25,803.75
"+3.3V VDD" on L1 "+3.3V_VDD_L01_P013" (solid, pour order 13): 613.5,555.5 613.5,550.5 676,488 697.5,509.5 677.5,529.5 677.5,547.5 695.56,565.56 682.11,579 659,579 635.69,579
+3.3V on L1 "+3.3V_L01_P012" (solid, pour order 12): 697,970 649,921 649,895 662,870 674.01,855.01 676.96,857.96 693,874 693,883 683.33,897.02 680,920 712,953
GND_CLASSIS on L1 "GND_CLASSIS_L01_P010" (solid, remove dead copper, pour order 10): 2010,1092.02 2010,887 2170,887 2170,752.02 2320,752.02 2320,342.02 2170,342.02 2170,212.02 2040,212.02 2040,12.02 2441.51,12.02 2441.51,1088.11 2013.91,1088.11
+3.3V on L3 "+3.3V_L03_P026" (solid, pour order 26): 23,17 24,16 1758,16 1758,128 1758,543 1894.18,543 1894.18,1085.82 1893,1087 23,1087
GND_CLASSIS on L3 "GND_CLASSIS_L03_P004" (solid, pour order 4): 2010,1085 2010,880 2170,880 2170,750 2315,750 2320,745 2320,340 2170,340 2170,210 2040,210 2040,10 2440,10 2435,15 2435,1085
GND on L2 "GND_L02_P031" (solid, pour order 31): 23,16 24,15 1758,15 1758,127 1758,542 1912,542 1912,1067 1893,1086 23,1086
GND_CLASSIS on L2 "GND_CLASSIS_L02_P008" (solid, remove dead copper, pour order 8): 2010,1090 2010,880 2170,880 2170,750 2320,750 2320,340 2170,340 2170,210 2040,210 2040,10 2441.51,10 2441.51,1086.09 2013.91,1086.09

## Silkscreen, mask and mechanical layers (free items; w line width, h text height)
Top Overlay:
  text "VER_1" at 1020,24 h60
Bottom Overlay:
  text "JEPHOANG" at 1366,43 h60